# Altium PCB DebugBreakout_RevD.PcbDoc
Units mil, origin at the board's own origin, x right, y up, seen from the top; angles counter-clockwise.
Board outline 1650 x 1525 mil, 2 copper layers (Top Layer, Bottom Layer); 11 components, 15 nets, 63 pads, 10 vias.
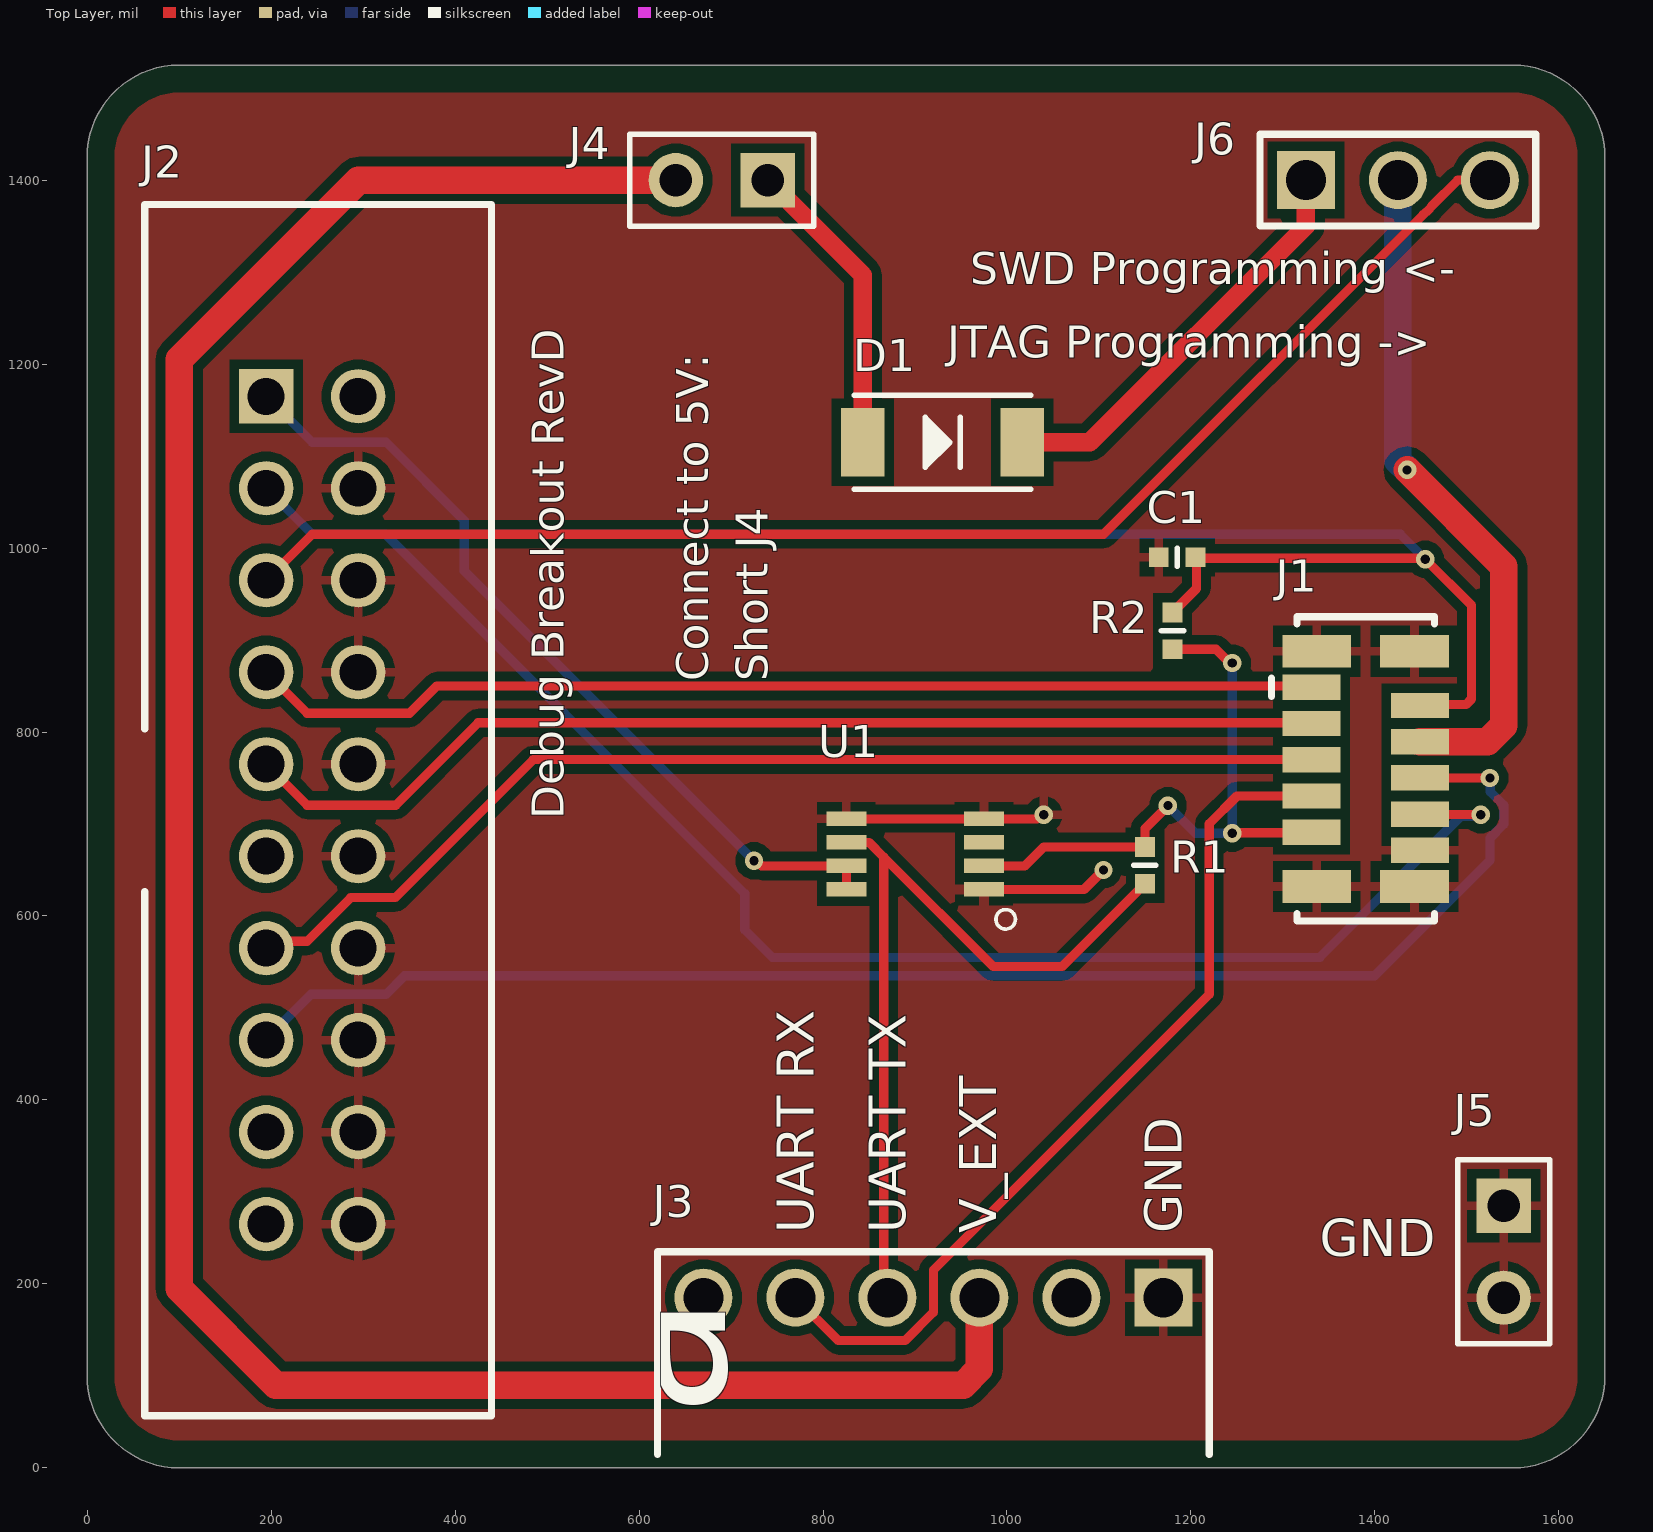
[diagram p0: Top Layer view]
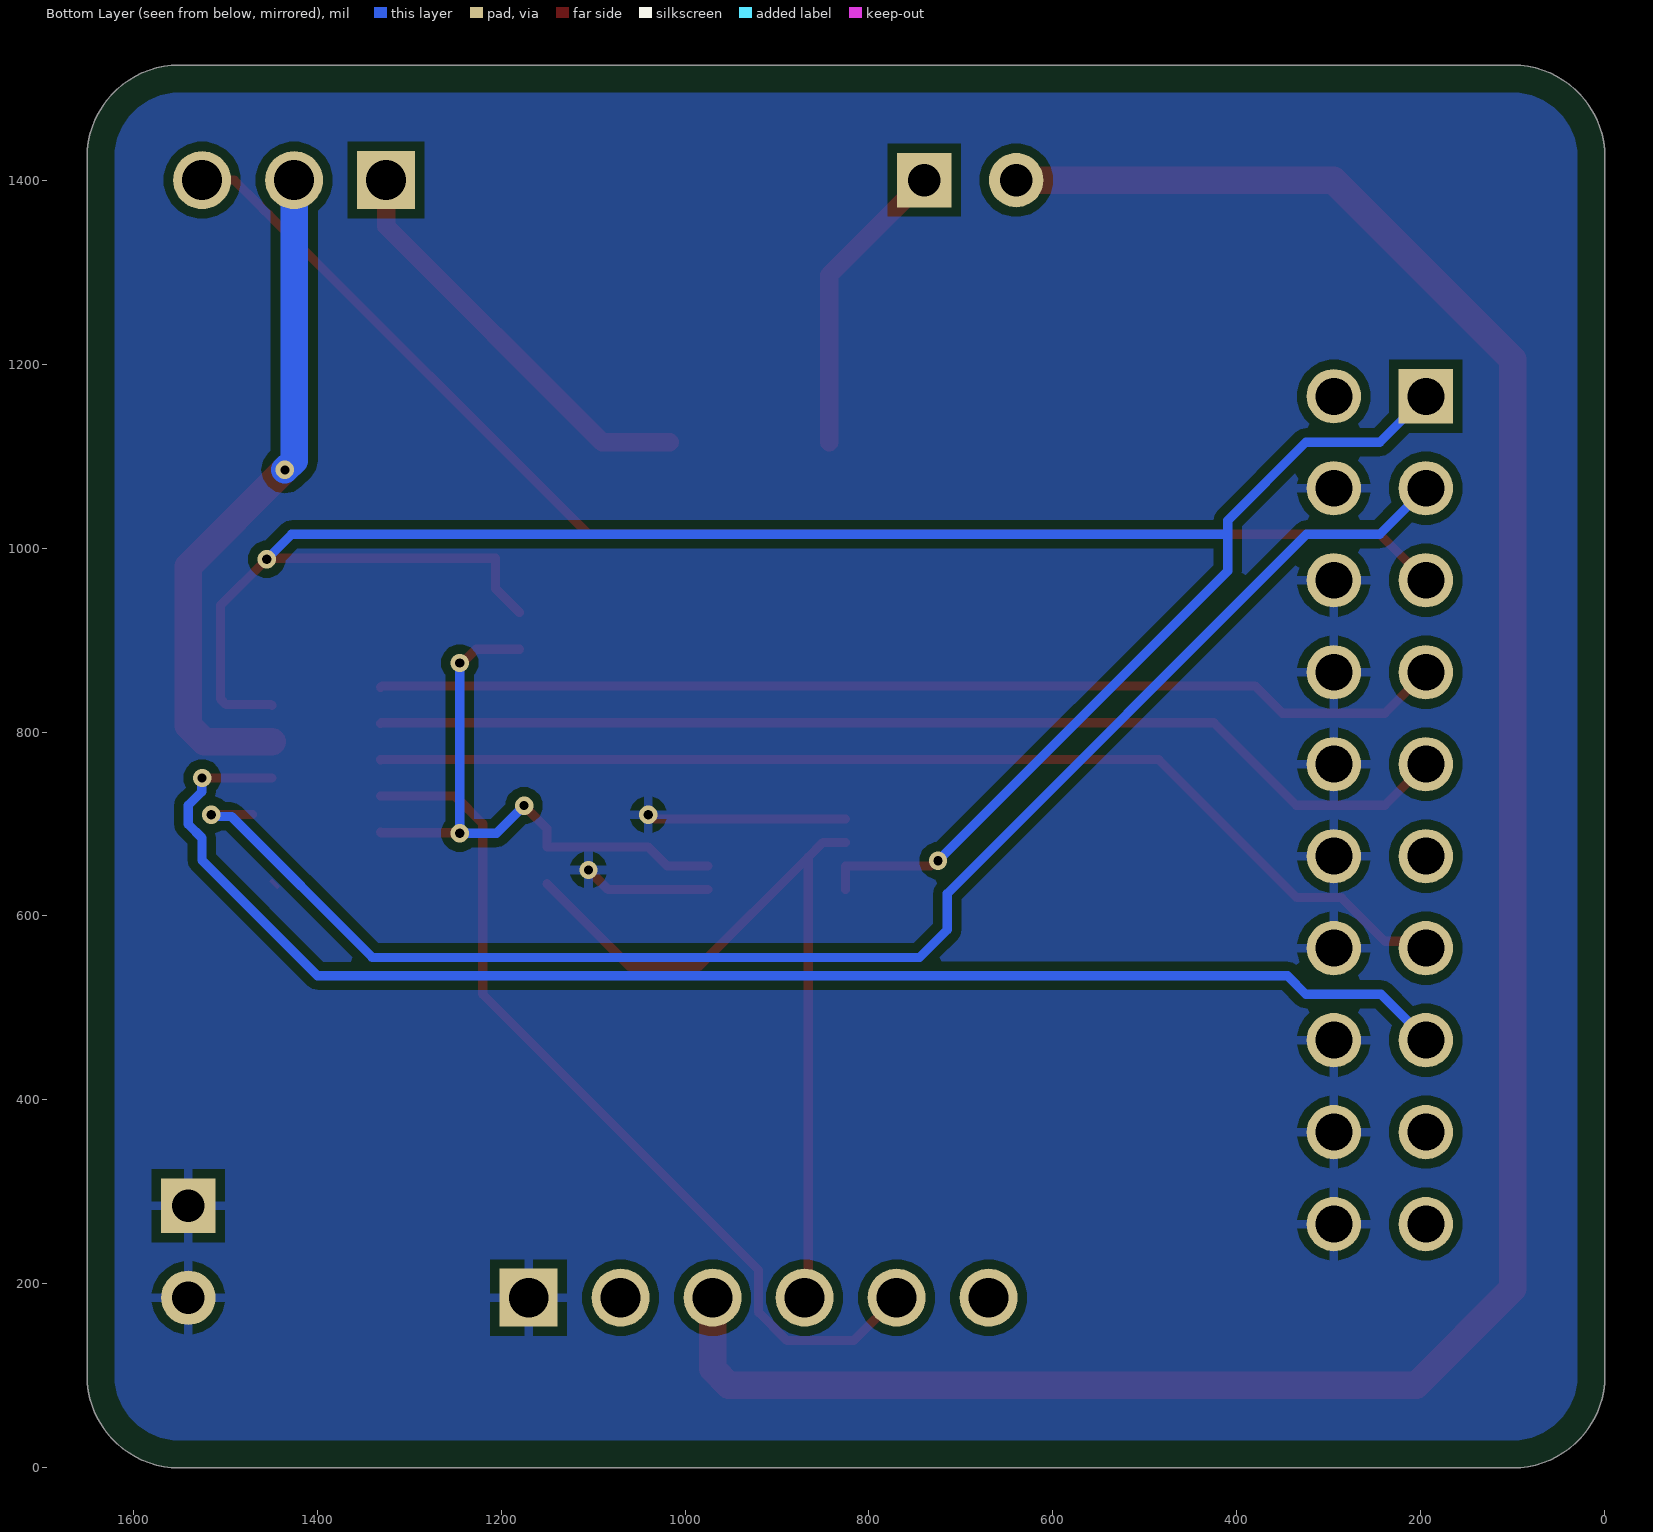
[diagram p1: Bottom Layer view, seen from below]
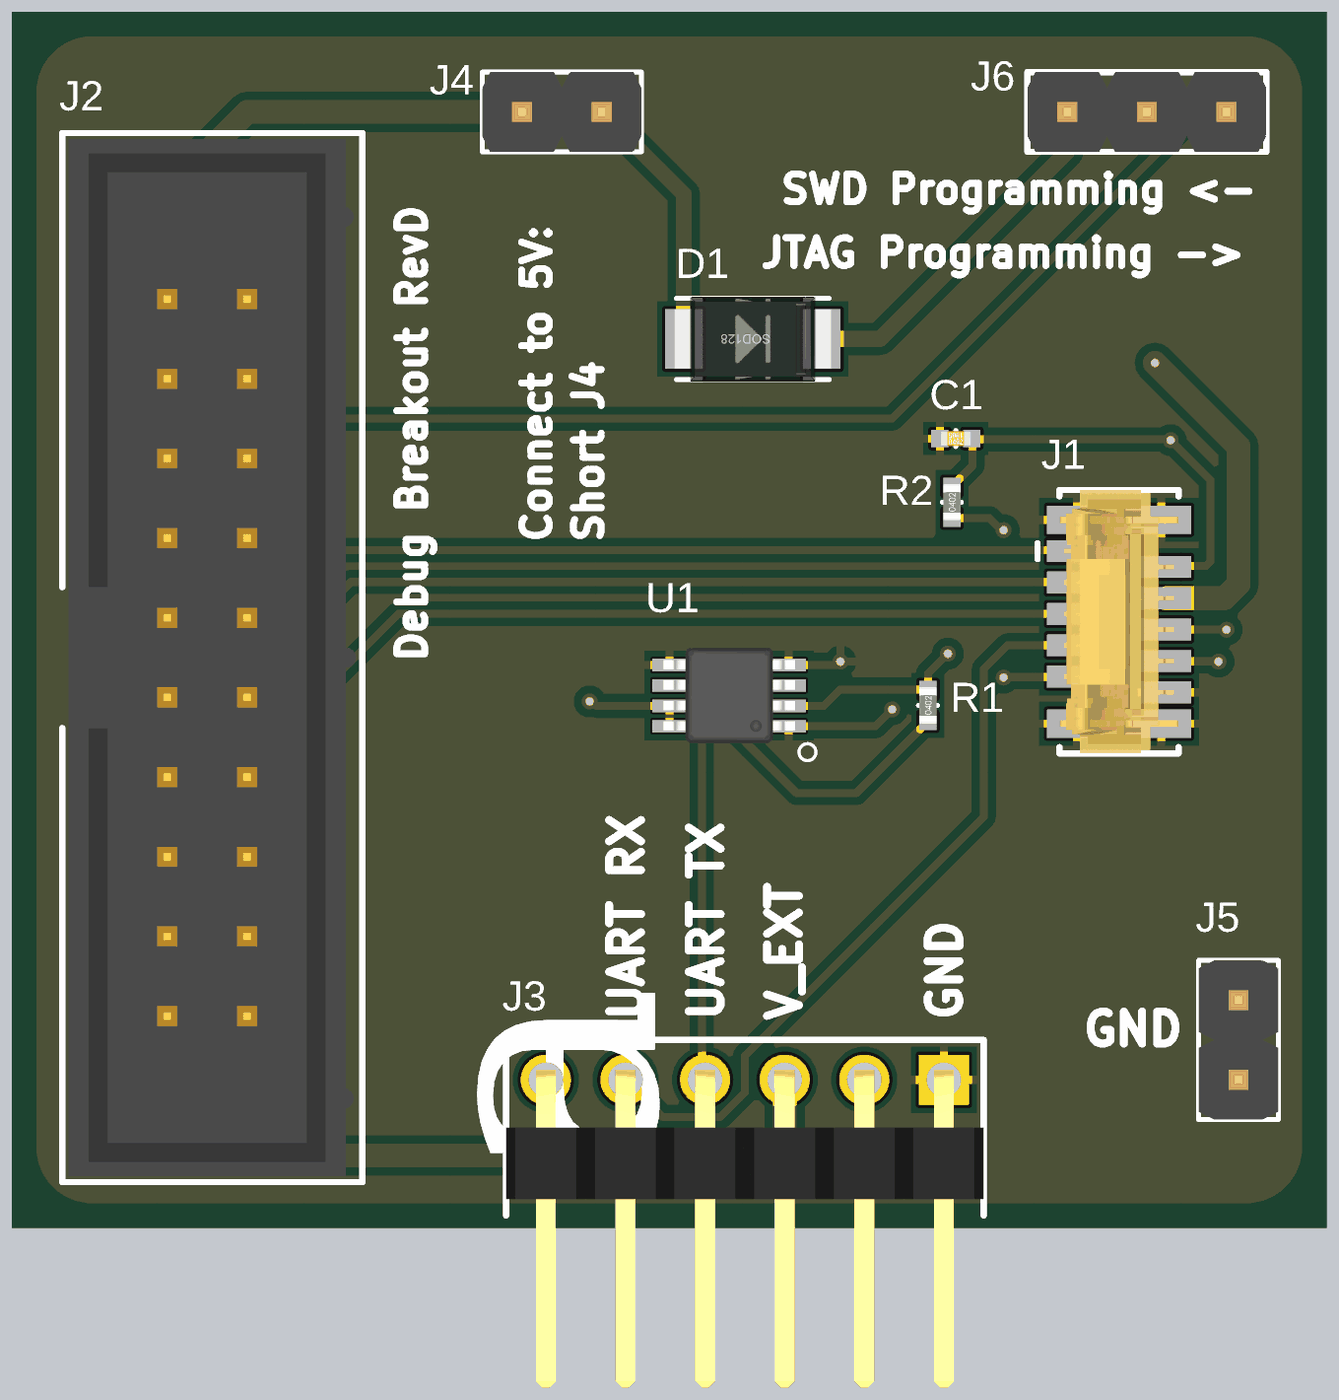
[diagram p2: 3D render of the assembled board from above, using the file's embedded part models]

## Layer stack, top to bottom
Top Solder: solder mask 0.4, Solder Resist, Dk 3.5
Top Layer: signal copper 1.4
Dielectric 1: dielectric 12.6, FR-4, Dk 4.8
Bottom Layer: signal copper 1.4
Bottom Solder: solder mask 0.4, Solder Resist, Dk 3.5

## Board outline
0,100 0,1425 cw(c100,1425) 100,1525 1550,1525 cw(c1550,1425) 1650,1425 1650,100 cw(c1550,100) 1550,0 100,0 cw(c100,100)

## Design rules (kind name [scope] priority, off if disabled: settings)
BoardOutlineClearance [All] p1: gap=30 ignorepadtopadclearanceinfootprint=FALSE except(10: Track-OutlineEdge)
Clearance "Board Clearance_4" [InNamedPolygon('GND_L02_P003')] p1: gap=10 ignorepadtopadclearanceinfootprint=FALSE except(0: Arc-Hole Track-Hole SMDPad-Hole THPad-Hole Via-Hole Fill-Hole Poly-Hole Region-Hole Text-Hole)
Clearance "Board Clearance_3" [InNamedPolygon('GND_L01_P002')] p2: gap=10 ignorepadtopadclearanceinfootprint=FALSE except(0: Arc-Hole Track-Hole SMDPad-Hole THPad-Hole Via-Hole Fill-Hole Poly-Hole Region-Hole Text-Hole)
Clearance Clearance_2 [InNamedPolygon('GND_L02_P003')] p3: gap=50 ignorepadtopadclearanceinfootprint=FALSE
Clearance "Board Clearance_2" [InNamedPolygon('GND_L01_P002')] p4: gap=50 ignorepadtopadclearanceinfootprint=FALSE
Clearance "Board Clearance_1" [InNamedPolygon('GND_L02_P003')] p5: gap=10 ignorepadtopadclearanceinfootprint=FALSE except(0: Arc-Hole Track-Hole SMDPad-Hole THPad-Hole Via-Hole Fill-Hole Poly-Hole Region-Hole Text-Hole)
Clearance "Board Clearance" [InNamedPolygon('GND_L01_P002')] p6: gap=10 ignorepadtopadclearanceinfootprint=FALSE except(0: Arc-Hole Track-Hole SMDPad-Hole THPad-Hole Via-Hole Fill-Hole Poly-Hole Region-Hole Text-Hole)
Clearance Clearance_1 [InNamedPolygon('GND_L01_P002')] p7: gap=10 ignorepadtopadclearanceinfootprint=FALSE except(0: Arc-Hole Track-Hole SMDPad-Hole THPad-Hole Via-Hole Fill-Hole Poly-Hole Region-Hole Text-Hole)
Clearance [All] p8: gap=10 ignorepadtopadclearanceinfootprint=FALSE except(0: Arc-Hole Track-Hole SMDPad-Hole THPad-Hole Via-Hole Fill-Hole Poly-Hole Region-Hole Text-Hole; 4: Arc-SMDPad Track-SMDPad SMDPad-SMDPad)
MinimumSolderMaskSliver [All] p1: minsoldermaskwidth=0
PolygonConnect [All] p1: connectstyle=Relief reliefconductorwidth=10 reliefentries=4 polygonreliefangle="90 Angle" airgapwidth=10
RoutingVias [All] p1: holewidth=28 width=50 viastyle="Through Hole" minholewidth=28 minwidth=50 maxholewidth=28 maxwidth=50
SilkToSolderMaskClearance [IsPad] p1: minsilkscreentomaskgap=4.5 clearancetoexposedcopper=TRUE
SolderMaskExpansion [All] p1: expansion=4 istentingtop=FALSE
SolderMaskExpansion SolderMaskExpansion_Via [IsVia] p2: expansion=4 istentingtop=TRUE
Width [All] p1: maxlimit=30 minlimit=5 preferedwidth=10
28 further rules are at their usual default settings.

## Components (designator, comment, footprint, x,y, rotation, side; value= is the part's Value field where it differs from the comment)
C1 "GRM155R71C104JA88D" CAP-0402 1185,990 r0 top value=0.1µF
D1 "PMEG3010EP,115" DIODE-SOD128 930,1115 r0 top
J1 "FH12-10S-0.5SVA(54)" "CONN-V-FPC-10P FH12-10S-0.5SVA(54)" 1390,760 r90 top
J2 "SBH11-PBPC-D10-ST-BK" HDR-V-2x10-KEYED 244.61,715 r90 top
J3 "TSW-106-09-T-S-RA" HDR-RA-1X6 920,185 r180 top
J4 "61300211121" HDR-V-1X2 690,1400 r180 top
J5 "61300211121" HDR-V-1X2 1540,235 r270 top
J6 "61300311121" HDR-V-1X3 1425,1400 r0 top
R1 "RC0402FR-070RL" RES-0402 1150,655 r270 top value=0Ω
R2 "RC0402FR-0747KL" RES-0402 1180,910 r270 top value=47kΩ
U1 "CLVC2G125IDCTRQ1" IC-SM8 986.69,725.71 r180 top

## Footprints (in the part's own frame and the unit in brackets; to place one, negate y for a bottom-side part, rotate by r counter-clockwise, add the part's x,y. Pads: shape width x height; smd on the part's side, far side on the other; paste and mask are expansions set on the pad)
CAP-0402 [mm]
  rect 0.55x0.55 smd: 1(-0.508,0) 2(0.508,0)
  silkscreen extent 0,-0.25 0,0.25, body extent -0.5,-0.25 0.5,0.25, height 0.5
"CONN-V-FPC-10P FH12-10S-0.5SVA(54)" [mm] "10 POS 0.5 MM PITCH FPC VERT"
  rect 0.7x1.6 smd: 1(2.25,1.5) 2(1.75,-1.5) 3(1.25,1.5) 4(0.75,-1.5) 5(0.25,1.5) 6(-0.25,-1.5) 7(-0.75,1.5) 8(-1.25,-1.5) 9(-1.75,1.5) 10(-2.25,-1.5)
  rect 0.9x1.9 smd: ME1(3.25,1.35) ME2(3.25,-1.35) ME3(-3.25,1.35) ME4(-3.25,-1.35)
  silkscreen extent -4.2,-1.9 4.2,2.6, body extent -4.2,-1.9 4.2,1.9, height 5.5
DIODE-SOD128 [mm]
  rect 1.2x1.9 smd: 1(2.2,0) 2(-2.2,0)
  silkscreen extent -2.44,-1.3 2.44,1.3, body extent -2.5,-1.35 2.5,1.35, height 1.1
HDR-RA-1X6 [mm]
  rect 1.6x1.6 hole 1.1: 1(-6.35,0)
  round 1.6 hole 1.1: 2(-3.81,0) 3(-1.27,0) 4(1.27,0) 5(3.81,0) 6(6.35,0)
  silkscreen extent -7.62,-1.27 7.62,4.33, body extent -7.62,-0.32 7.62,9.81, height 2.51
HDR-V-1X2 [mm]
  rect 1.5x1.5 hole 0.9: 1(-1.27,0)
  round 1.5 hole 0.9: 2(1.27,0)
  silkscreen extent -2.54,-1.27 2.54,1.27, body extent -2.54,-1.27 2.54,1.27, height 8.55
HDR-V-1X3 [mm]
  rect 1.6x1.6 hole 1.1: 1(-2.54,0)
  round 1.6 hole 1.1: 2(0,0) 3(2.54,0)
  silkscreen extent -3.81,-1.27 3.81,1.27, body extent -3.81,-1.27 3.81,1.27, height 8.55
HDR-V-2x10-KEYED [mm]
  rect 1.5x1.5 hole 1.02: 1(11.43,1.27)
  round 1.5 hole 1.02: 2(11.43,-1.27) 3(8.89,1.27) 4(8.89,-1.27) 5(6.35,1.27) 6(6.35,-1.27) 7(3.81,1.27) 8(3.81,-1.27) 9(1.27,1.27) 10(1.27,-1.27) 11(-1.27,1.27) 12(-1.27,-1.27) 13(-3.81,1.27) 14(-3.81,-1.27) 15(-6.35,1.27) 16(-6.35,-1.27) 17(-8.89,1.27) 18(-8.89,-1.27) 19(-11.43,1.27) 20(-11.43,-1.27)
  silkscreen extent -16.73,-4.95 16.73,4.62, body extent -16.53,-4.75 16.53,4.42, height 9
IC-SM8 [mm]
  rect 1.1x0.4 smd mask+0.07: 1(0.297,2.461) 2(0.297,1.811) 3(0.297,1.161) 4(0.297,0.511) 5(4.097,0.511) 6(4.097,1.161) 7(4.097,1.811) 8(4.097,2.461)
  silkscreen extent -0.57,3.02 -0.03,3.56, body extent 0.09,-0.05 4.29,3, height 1.3
RES-0402 [mm]
  rect 0.55x0.55 smd: 1(-0.508,0) 2(0.508,0)
  silkscreen extent 0,-0.3 0,0.3, body extent -0.58,-0.27 0.57,0.27, height 0.41

## Part data
C1: library part CAP-0.1uF-16V-0402, "CAP CER 0.1UF 16V X7R 0402 5%", Capacitance=100nF, Case Code (Imperial)=0402, Case Code (Metric)=1005, Dielectric=X7R, Manufacturer=Murata, Max Operating Temperature=125°C, Min Operating Temperature=-55°C, Package Quantity=10000, Supplier Part Number 1=490-6327-6-ND, Tolerance=±5%, Voltage=16V, Case/Package=0402, ComponentLink1Description=http://www.mouser.com/ds/2/281/c02e-2905.pdf, ComponentLink1URL=http://www.mouser.com/ds/2/281/c02e-2905.pdf, ComponentLink2Description=http://www.murata.com/products/catalog/pdf/c02e.pdf, ComponentLink2URL=http://www.murata.com/products/catalog/pdf/c02e.pdf, ComponentLink3Description=http://search.murata.co.jp/Ceramy/image/img/A01X/G101/ENG/GRM155R71C104JA88-01.pdf, ComponentLink3URL=http://search.murata.co.jp/Ceramy/image/img/A01X/G101/ENG/GRM155R71C104JA88-01.pdf, Depth=0.5mm, Height=0.5mm, Lead Free="Lead Free", Length=1mm, Manufacturer 1=Murata, Manufacturer Part Number 1=GRM155R71C104JA88D, Mount="Surface Mount", MPN=GRM155R71C104JA88D, Packaging="Tape and Reel", Pricing 1="1=0.1, 10=0.051, 100=0.0225, 500=0.0161, 1000=0.01265, 2500=0.0115, 5000=0.01058 (USD)", Radiation Hardening=No, REACH SVHC="No SVHC", Stock 1=100000, Supplier 1=Digi-Key, Termination=SMD/SMT, Thickness=0.022inch, Voltage Rating=16V, Voltage Rating (DC)=16V, Width=0.02inch
D1: library part DIODE-SCHOTTKY-30V-1A-SOD128, "DIODE SCHOTTKY 30V 1A SOD128", Base Part Number=PMEG3010, Capacitance @ Vr, F="170pF @ 1V, 1MHz", Current - Average Rectified (Io)=1A, Manufacturer 1="Nexperia USA Inc.", Operating Temperature - Junction="150°C (Max)", Package / Case=SOD-128, Reverse Voltage=30V, Supplier Device Package=CFP5, Supplier Part Number 1=1727-5408-1-ND, Category="Discrete Semiconductor Products", ComponentLink1Description=https://assets.nexperia.com/documents/data-sheet/PMEG3010EP.pdf, ComponentLink1URL=https://assets.nexperia.com/documents/data-sheet/PMEG3010EP.pdf, Diode Type=Schottky, Manufacturer Part Number 1=PMEG3010EP,115, Mounting Type="Surface Mount", Packaging="Tape & Reel (TR)", Part Status=Active, Pricing 1="3000=0.11556, 6000=0.10856, 15000=0.10155, 30000=0.09338 (USD)", RoHS="RoHS Compliant", Speed="Fast Recovery =< 500ns, > 200mA (Io)", Stock 1=0, Supplier 1=Digi-Key
J1: library part CONN-V-FPC-10P-0.5MM, "CONN FFC VERT 10POS 0.50MM SMD", Contact Resistance=50mR, Current Rating=500mA, Flammability Rating="UL94 V-0", Insulation Resistance=500MR, Manufacturer 1=Hirose, Max Operating Temperature=85°C, Min Operating Temperature=-40°C, Package Quantity=1000, Supplier Part Number 1=H125134CT-ND, Voltage Rating=50V, Actuator Material=Polyphenylene, ComponentLink1Description=https://datasheet.ciiva.com/18554/fh12-18554796.pdf?src-supplier=Digi-Key, ComponentLink1URL=https://datasheet.ciiva.com/18554/fh12-18554796.pdf?src-supplier=Digi-Key, ComponentLink2Description=https://datasheet.ciiva.com/13702/ed-fh12-20140305-355586-13702565.pdf?src-supplier=Mouser, ComponentLink2URL=https://datasheet.ciiva.com/13702/ed-fh12-20140305-355586-13702565.pdf?src-supplier=Mouser, Contact Material=Bronze, Contact Plating=Gold, Gender=Receptacle, Housing Material=Nylon, Lead Free="Lead Free", Manufacturer Part Number 1=FH12-10S-0.5SVA(54), Material=Nylon, Mating Cycles=20, Mount="Surface Mount", Number of Positions=10, Number of Rows=1, Packaging="Tape and Reel", Pitch=0.02inch, Pricing 1="1=1.18000, 10=1.03800, 25=0.97680, 50=0.93620, 100=0.89540, 250=0.81400, 500=0.73260 (USD)", REACH SVHC=Unknown, RoHS=Yes, Stock 1=1442, Supplier 1=Digi-Key, Termination=Solder, Wire/Cable Type=Straight
J2: library part HDR-V-2x10-M, "CONN HEADER VERT 20POS 2.54MM", Color=Black, Manufacturer 1=Sullins, Package Quantity=1, Supplier Part Number 1=S9172-ND, ComponentLink1Description=https://datasheet.ciiva.com/730/sbh11-pbpc-dxx-st-xx-730919.pdf?src-supplier=Digi-Key, ComponentLink1URL=https://datasheet.ciiva.com/730/sbh11-pbpc-dxx-st-xx-730919.pdf?src-supplier=Digi-Key, Connector Type="Male Pin", Contact Plating=Gold, Lead Free="Lead Free", Manufacturer Part Number 1=SBH11-PBPC-D10-ST-BK, Mount="Through Hole", Number of Positions=20, Number of Rows=2, Packaging=Tray, Pitch=0.1inch, Pricing 1="1=0.54000, 10=0.51000, 100=0.39120, 500=0.34020, 1000=0.28067, 5000=0.24665, 10000=0.24570 (USD)", RoHS=Yes, Row Spacing=0.1inch, Stock 1=23438, Supplier 1=Digi-Key, Termination=Solder
J3: library part HDR-RA-1X6-M, "Conn Unshrouded Header HDR 6 POS 2.54mm Solder RA Thru-Hole Automotive Bulk", Color=Black, Manufacturer 1=Samtec, Max Current Rating=7.6A, Max Operating Temperature=105°C, Max Voltage Rating (AC)=450V, Min Operating Temperature=-55°C, Supplier Part Number 1=SAM15949-ND, Category="Headers and Wire Housings", ComponentLink1Description=https://datasheet.ciiva.com/48560/htsw-th-48560268.pdf?src-supplier=Avnet, ComponentLink1URL=https://datasheet.ciiva.com/48560/htsw-th-48560268.pdf?src-supplier=Avnet, ComponentLink2Description=https://datasheet.ciiva.com/739/tsw-xxx-xx-xxx-x-xx-xxx-mkt-739950.pdf?src-supplier=Digi-Key, ComponentLink2URL=https://datasheet.ciiva.com/739/tsw-xxx-xx-xxx-x-xx-xxx-mkt-739950.pdf?src-supplier=Digi-Key, Connector Type="Male Pin", Contact Material=Bronze, Contact Mating Length=0.23inch, Contact Plating=Tin, Depth=9.9mm, Gender=Male, Housing Color=Black, Housing Material=Polyester, Length=15.24mm, Manufacturer Part Number 1=TSW-106-09-T-S-RA, Mount="Through Hole", Number of Contacts=6, Number of Positions=6, Number of Rows=1, Orientation="Right Angle", Packaging=Bulk, Pitch=2.54mm, Pricing 1="1=0.46000, 10=0.43500, 100=0.33350, 500=0.29000, 1000=0.23925, 5000=0.21025, 10000=0.19575 (USD)", Radiation Hardening=No, REACH SVHC="No SVHC", RoHS=Yes, Stock 1=1097, Supplier 1=Digi-Key, Termination=Solder
J4 J5: library part HDR-V-1X2-M, "Header, 2-Pin, 0.1\"", Colour=Black, Current Rating=3A, Manufacturer="Wurth Electronics", Max Operating Temperature=125°C, Min Operating Temperature=-40°C, Supplier Part Number 1=732-5315-ND, Voltage Rating=250V, ComponentLink1Description=https://datasheet.ciiva.com/13619/6130xx11121-48870-13619345.pdf, ComponentLink1URL=https://datasheet.ciiva.com/13619/6130xx11121-48870-13619345.pdf, Connector Type="Male Pin", Contact Gender=Male, Contact Material="Copper,Copper Alloy", Contact Mating Length=0.236inch, Contact Plating=Gold, Gender=Male, Housing Material=PBT, LatestRevisionDate=17-Jul-2002, LatestRevisionNote="Re-released for DXP Platform.", Lead Free="Lead Free", Manufacturer 1="Wurth Electronics", Manufacturer Part Number 1=61300211121, Mount="Through Hole", MPN=61300211121, Number of Contacts=2, Number of Positions=2, Number of Rows=1, Packaging=Bulk, Pitch=0.1inch, Pricing 1="1=0.13, 10=0.106, 25=0.088, 50=0.074, 100=0.067, 1000=0.061 (USD)", Publisher="Altium Limited", REACH SVHC=Unknown, Stock 1=88010, Supplier 1=Digi-Key, Termination="Through Hole"
J6: library part HDR-V-1X3-M, "Header, 3-Pin, 0.1\"", Colour=Black, Manufacturer="Wurth Electronics", Supplier Part Number 1=732-5316-ND, ComponentLink1Description=http://www.farnell.com/cad/1737268.pdf, ComponentLink1URL=http://www.farnell.com/cad/1737268.pdf, ComponentLink2Description=http://katalog.we-online.de/em/datasheet/6130xx11121.pdf, ComponentLink2URL=http://katalog.we-online.de/em/datasheet/6130xx11121.pdf, Connector Type="Male Pin", Contact Material=Copper, Contact Mating Length=0.236inch, Contact Plating=Gold, Gender=Male, LatestRevisionDate=17-Jul-2002, LatestRevisionNote="Re-released for DXP Platform.", Lead Free="Lead Free", Manufacturer 1="Wurth Electronics", Manufacturer Part Number 1=61300311121, Mount="Through Hole", MPN=61300311121, Number of Contacts=3, Number of Positions=3, Number of Rows=1, Packaging=Bulk, Pitch=0.1inch, Pricing 1="1=0.13, 10=0.106, 25=0.088, 50=0.074, 100=0.067, 1000=0.061 (USD)", Publisher="Altium Limited", REACH SVHC=Unknown, Stock 1=41782, Supplier 1=Digi-Key, Termination=Solder
R1: library part RES-0-0402, "RES 0 OHM JUMPER 1/16W 0402", Manufacturer=Yageo, Max Operating Temperature=155°C, Min Operating Temperature=-55°C, Package Shape=Rectangular, Rated Power Dissipation (P)=62.5mW, Rated Temperature=70°C, Resistance=0R, Resistor Type="FIXED RESISTOR", Supplier Part Number 1=311-0.0LRTR-ND, Tolerance=Jumper, Category="Chip SMD Resistors", ComponentLink1Description=https://datasheet.ciiva.com:443/pdfs/VipMasterIC/IC/YAGO/YAGOS02562/YAGOS02562-1.pdf?src-supplier=IHS+Markit, ComponentLink1URL=https://datasheet.ciiva.com:443/pdfs/VipMasterIC/IC/YAGO/YAGOS02562/YAGOS02562-1.pdf?src-supplier=IHS+Markit, ComponentLink2Description=https://datasheet.ciiva.com/8896/pyu-rc0402-51-rohs-l-6-8896149.pdf?src-supplier=Avnet, ComponentLink2URL=https://datasheet.ciiva.com/8896/pyu-rc0402-51-rohs-l-6-8896149.pdf?src-supplier=Avnet, ComponentLink3Description=https://datasheet.ciiva.com/16790/pyu-rc0402-51-rohs-l-6-r-16790444.pdf?src-supplier=Future+Electronics, ComponentLink3URL=https://datasheet.ciiva.com/16790/pyu-rc0402-51-rohs-l-6-r-16790444.pdf?src-supplier=Future+Electronics, ComponentLink4Description=https://datasheet.ciiva.com/28419/pyu-rc0402-51-rohs-l-6-28419661.pdf?src-supplier=Avnet+Europe, ComponentLink4URL=https://datasheet.ciiva.com/28419/pyu-rc0402-51-rohs-l-6-28419661.pdf?src-supplier=Avnet+Europe, ComponentLink5Description=https://datasheet.ciiva.com/16869/pyu-rc0402-51-rohs-l-6-16869518.pdf?src-supplier=Avnet+Europe, ComponentLink5URL=https://datasheet.ciiva.com/16869/pyu-rc0402-51-rohs-l-6-16869518.pdf?src-supplier=Avnet+Europe, JESD-609 Code=e3, Manufacturer 1=Yageo, Manufacturer Part Number=RC0402FR-070RL, Manufacturer Part Number 1=RC0402FR-070RL, Manufacturer_PN=RC0402FR-070RL, Mount="Surface Mount", Number of Pins=2, Packaging="Tape and Reel", Pricing 1="10000=0.00132, 30000=0.00116, 50000=0.00109 (USD)", REACH SVHC=Yes, RoHS=Yes, RoHS Compliant=Yes, Size Code=0402, Stock 1=2669862, Supplier 1=Digi-Key, Technology="METAL GLAZE/THICK FILM", Terminal Finish=Nickel, Termination=Wraparound
R2: library part RES-47K-0402, "RES SMD 47K OHM 1% 1/16W 0402", Case Code (Imperial)=0402, Case Code (Metric)=1005, Manufacturer 1=Yageo, Max Operating Temperature=155°C, Max Power Dissipation=63mW, Min Operating Temperature=-55°C, Package Quantity=1, Power Rating=62.5mW, Resistance=47kR, Supplier Part Number 1=311-47.0KLRCT-ND, Temperature Coefficient=100ppm/°C, Tolerance=±1%, Voltage Rating=50V, Case/Package=0402, ComponentLink1Description=https://datasheet.ciiva.com/16793/pyu-rc0402-51-rohs-l-6-r-16793430.pdf?src-supplier=Future+Electronics, ComponentLink1URL=https://datasheet.ciiva.com/16793/pyu-rc0402-51-rohs-l-6-r-16793430.pdf?src-supplier=Future+Electronics, ComponentLink2Description=https://datasheet.ciiva.com/46412/1018594-46412839.pdf?src-supplier=Element14, ComponentLink2URL=https://datasheet.ciiva.com/46412/1018594-46412839.pdf?src-supplier=Element14, ComponentLink3Description=https://datasheet.ciiva.com/15189/getdatasheetpartid-323748-15189466.pdf?src-supplier=Verical, ComponentLink3URL=https://datasheet.ciiva.com/15189/getdatasheetpartid-323748-15189466.pdf?src-supplier=Verical, ComponentLink4Description=https://datasheet.ciiva.com/2453/pyu-r-int-thick-7-2453388.pdf?src-supplier=Digi-Key, ComponentLink4URL=https://datasheet.ciiva.com/2453/pyu-r-int-thick-7-2453388.pdf?src-supplier=Digi-Key, ComponentLink5Description=https://datasheet.ciiva.com/2453/pyu-r-int-thick-7-2453389.pdf?src-supplier=Digi-Key, ComponentLink5URL=https://datasheet.ciiva.com/2453/pyu-r-int-thick-7-2453389.pdf?src-supplier=Digi-Key, ComponentLink6Description=https://datasheet.ciiva.com/2453/pyu-r-int-thick-7-2453390.pdf?src-supplier=Digi-Key, ComponentLink6URL=https://datasheet.ciiva.com/2453/pyu-r-int-thick-7-2453390.pdf?src-supplier=Digi-Key, Composition="Thick Film", Depth=0.5mm, Features="Moisture Resistant", Height=0.016inch, Lead Free="Lead Free", Length=1mm, Manufacturer Part Number 1=RC0402FR-0747KL, Military Standard=Not, Number of Terminations=2, Packaging="Tape and Reel", Pricing 1="1=0.10000, 10=0.01600, 100=0.00640, 1000=0.00289, 2500=0.00251, 5000=0.00207 (USD)", REACH SVHC=Unknown, RoHS=Yes, Stock 1=8667869, Supplier 1=Digi-Key, Termination=SMD/SMT, Width=0.5mm
U1: library part IC-CLVC2G125I, "5.5 V SMT Dual Buffer Gate with 3-State Outputs - SM8", Manufacturer 1="Texas Instruments", Supplier Part Number 1=296-30598-1-ND, Category="Buffers, Drivers and Transceivers", Manufacturer Part Number 1=CLVC2G125IDCTRQ1, RoHS=No, Supplier 1=Digi-Key

## Via types
v1: diameter 20, hole 10, Top Layer to Bottom Layer, tented both sides, 10 vias

## Nets (pads, with @x,y where several pads share a name; then routed paths per layer and width w, separated by ;. In a path a pad name is that pad's centre, name@x,y a point inside that pad or via, vN(x,y) a via of type N, cw(c..) or ccw(c..) an arc to the next point about the centre after c; other vN are vias at no path point)
3V3: C1.2 J1.2 J2.1 R2.1 U1.7 U1.8 | length 2506.7
  Top Layer w10: v1(725,660) 727.71,660 733.3,654.41 U1.7 U1.8 ; R2.1 1206.04,956.04 1206.04,988.96 1453.78,988.96 v1(1454.82,987.92) 1505,937.73 1505,835.86 1499.14,830 1450.16,830 J1.2
  Bottom Layer w10: J2.1 244.61,1115 325,1115 410,1030 410,1015 ; v1(725,660) 410,975 410,1015 ; v1(1454.82,987.92) 1427.73,1015 410,1015
CONN_UART_TX: J1.9 R1.1 R2.2 U1.2 | length 663.9
  Top Layer w10: U1.2 1019.41,654.41 1040,675 R1.1 1150,695 v1(1175,720) ; R2.2 1227.29,890 1242.29,875 v1(1245,875) ; v1(1245,690) 1245.55,690.55 1330.39,690.55 J1.9
  Bottom Layer w10: v1(1175,720) 1205,690 v1(1245,690) v1(1245,875)
GND: C1.1 J1.10 J1.ME1 J1.ME2 J1.ME3 J1.ME4 J2.4 J2.6 J2.8 J2.10 J2.12 J2.14 J2.16 J2.18 J2.20 J3.1 J5.1 J5.2 U1.1 U1.4 U1.5 | length 363.6
  Top Layer w5: J1.ME4 J1.ME4@1449.06,637.95
  Top Layer w10: U1.5 U1.4 1032.88,705.59 1037.29,710 v1(1040,710) ; U1.1 1083.82,628.82 v1(1105,650)
NetD1_1: D1.1 J6.1 | length 455.7
  Top Layer w20: D1.1 1090,1115 1325,1350 J6.1
NetJ1_4: J1.4 J6.2 | length 738.8
  Top Layer w30: v1(1435,1085) 1540,980 1540,807.1 1522.43,789.53 J1.4
  Bottom Layer w30: J6.2 1425,1095 v1(1435,1085)
NRST: J1.6 J2.15 | length 1589.9
  Top Layer w10: J1.6 1449.13,750.08 1524.92,750.08 v1(1525,750)
  Bottom Layer w10: J2.15 194.61,466.33 243.28,515 325,515 345,535 1399.57,535 1525.18,660.61 1525.18,684.82 1540,699.64 1540,720.36 1525.36,735 1525.36,749.64 v1@1525.18,749.82
SWCLK/TCLK: J1.3 J2.9 | length 1192.2
  Top Layer w10: J2.9 239.14,720.47 335.47,720.47 425,810 1330.16,810 J1.3
SWDIO/TMS: J1.1 J2.7 | length 1167.6
  Top Layer w10: J2.7 239.14,820.47 350.47,820.47 380,850 1329.53,850 J1.1
SWO/TDO: J1.5 J2.13 | length 1221.3
  Top Layer w10: J2.13 202.11,572.5 239.14,572.5 286.64,620 335,620 485,770 1330.79,770 J1.5
TDI: J2.5 J6.3 | length 1510.6
  Top Layer w10: J2.5 244.61,1015 1105,1015 1452.53,1362.53 ccw(c1425,1400) 1462.47,1372.47 1490,1400 J6.3
TRST: J1.8 J2.3 | length 1663.7
  Top Layer w10: J1.8@1470.39,710.39 1514.61,710.39 v1(1515,710)
  Bottom Layer w10: J2.3 244.61,1015 324.35,1015 715,624.35 715,585 745,555 1340,555 1493.09,708.09 1513.09,708.09 v1(1515,710)
UART_RX: J1.7 J3.5 | length 960.8
  Top Layer w10: J3.5 816.5,138.5 889.26,138.5 920,169.24 920,215 1220,515 1220,700.36 1250.12,730.47 J1.7
UART_TX: J3.4 R1.2 U1.6 | length 898.5
  Top Layer w10: U1.6 850,680 865.97,664.03 ; J3.4 865.97,189.03 865.97,664.03 ; R1.2 1060,545 985,545 865.97,664.03
V_EXT: J3.3 J4.2 | length 2629
  Top Layer w30: J4.2 295,1400 100,1205 100,195 205,90 952.43,90 970,107.57 J3.3
VBUS_5V: D1.2 J4.1 | length 327.8
  Top Layer w20: J4.1 843.39,1296.61 D1.2
pads on no net: J2.2 J2.11 J2.17 J2.19 J3.2 J3.6 U1.3

## Polygon pours and split planes (outlines as drawn)
GND on Bottom Layer "GND_L02_P008" (solid, pour order 8): 0,100 0,1425 cw(c100,1425) 100,1525 1550,1525 cw(c1550,1425) 1650,1425 1650,100 cw(c1550,100) 1550,0 100,0 cw(c100,100)
GND on Top Layer "GND_L01_P006" (solid, pour order 6): 0,100 0,1425 cw(c100,1425) 100,1525 1550,1525 cw(c1550,1425) 1650,1425 1650,100 cw(c1550,100) 1550,0 100,0 cw(c100,100)

## Silkscreen, mask and mechanical layers (free items; w line width, h text height)
Top Overlay:
  text "SWD Programming <-" at 960,1286.66 h35
  text "JTAG Programming ->" at 935,1206.66 h35
  text "Connect to 5V:" at 675,855 h35 r90
  text "Short J4" at 740,855 h35 r90
  text "Debug Breakout RevD" at 518.34,705 h35 r90
  text "UART RX" at 790,255 h40 r90
  text "UART TX" at 890,255 h40 r90
  text "V_EXT" at 988.34,255 h40 r90
  text "GND" at 1190,255 h40 r90
  text "GND" at 1340,230 h40
  text "a" at 807.38,55 h600 r90
Top Courtyard:
  the board outline again, w10